# Altium PCB QNA-control-panel.PcbDoc
Units mil, origin at the board's own origin, x right, y up, seen from the top; angles counter-clockwise.
Board outline 12000 x 3500 mil, 2 copper layers (Top Layer, Bottom Layer); 43 components, 30 nets, 123 pads, 3 vias.
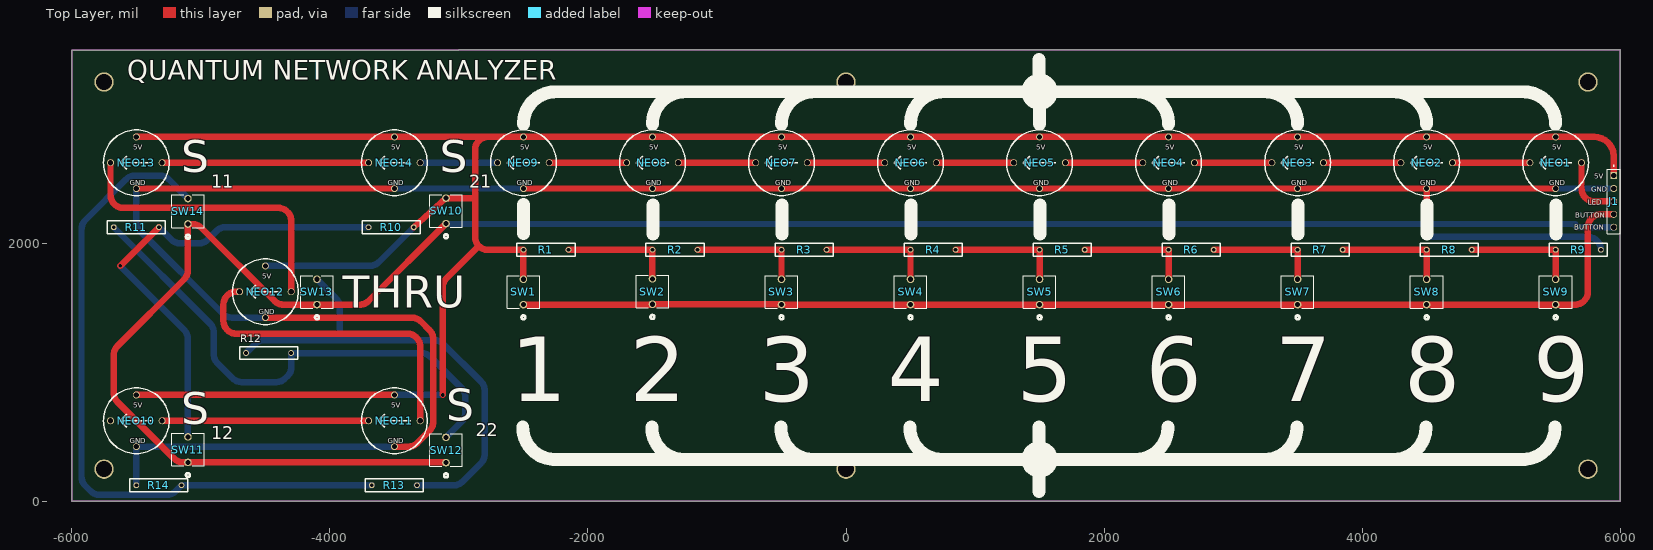
[diagram p0: Top Layer view]
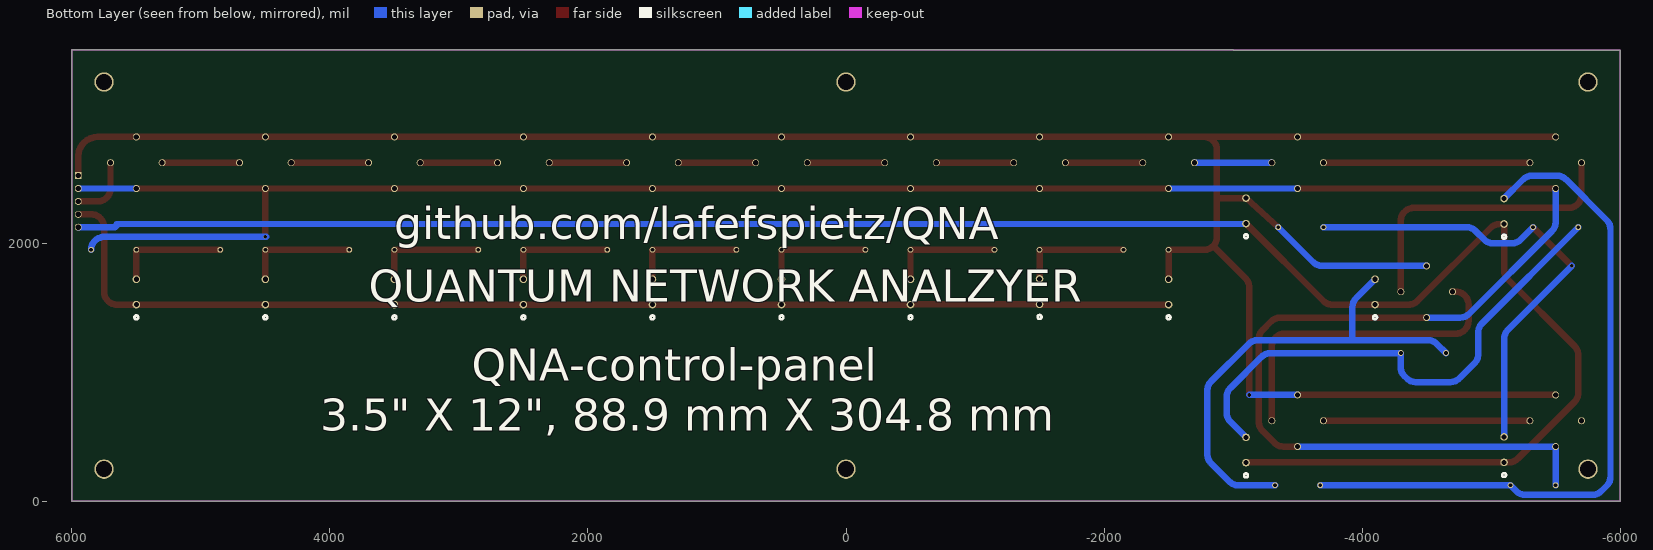
[diagram p1: Bottom Layer view, seen from below]
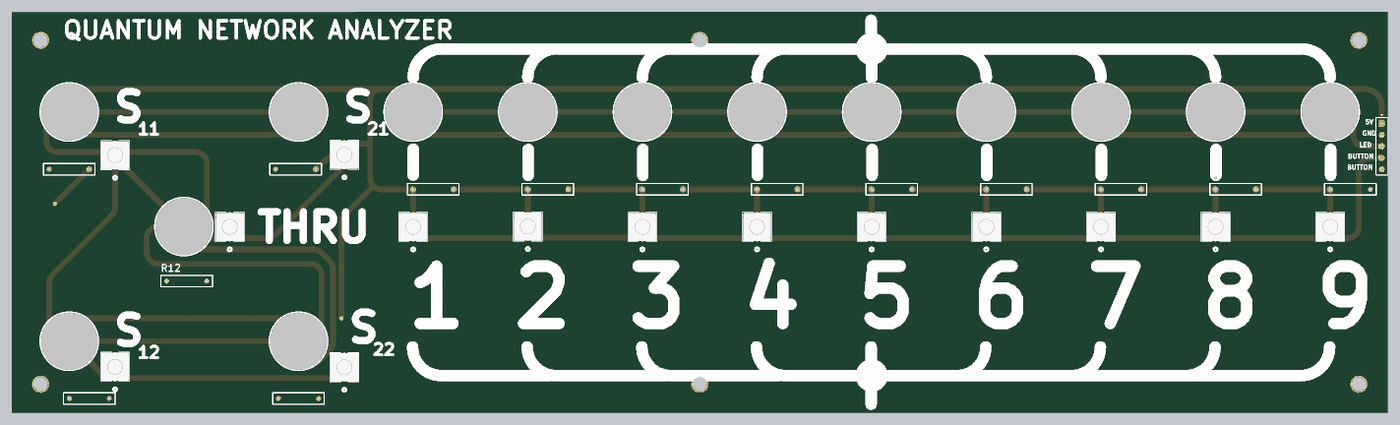
[diagram p2: 3D render of the assembled board from above, using the file's embedded part models]

## Layer stack, top to bottom
Top Solder: solder mask 0.4, Solder Resist, Dk 3.5
Top Layer: signal copper 1.4
Dielectric 1: dielectric 12.6, FR-4, Dk 4.8
Bottom Layer: signal copper 1.4
Bottom Solder: solder mask 0.4, Solder Resist, Dk 3.5

## Board outline
-6000,0 -6000,3495 -3000,3495 -3000,3500 6000,3500 6000,0

## Design rules (kind name [scope] priority, off if disabled: settings)
Clearance [All] p1: gap=10 ignorepadtopadclearanceinfootprint=FALSE except(0: Arc-Hole Track-Hole SMDPad-Hole THPad-Hole Via-Hole Fill-Hole Poly-Hole Region-Hole Text-Hole)
PolygonConnect [All] p1: connectstyle=Relief reliefconductorwidth=10 reliefentries=4 polygonreliefangle="90 Angle" airgapwidth=10
RoutingVias [All] p1: holewidth=28 width=50 viastyle="Through Hole" minholewidth=28 minwidth=50 maxholewidth=28 maxwidth=50
SolderMaskExpansion [All] p1: expansion=4 istentingtop=FALSE
Width [All] p1: maxlimit=150 minlimit=10 preferedwidth=50 toplayer_maxwidth=100 minimp=50.000000 maximp=50.000000 favimp=50.000000
30 further rules are at their usual default settings.

## Components (designator, comment, footprint, x,y, rotation, side; value= is the part's Value field where it differs from the comment)
J1 "TSW-105-07-G-S" SAMTEC_TSW-105-07-G-S 5950,2325 r270 top
NEO1 "adafruit-1559-neopixel-flora" adafruit-1559-neopixel-flora 5500,2625 r0 top
NEO2 "adafruit-1559-neopixel-flora" adafruit-1559-neopixel-flora 4500,2625 r0 top
NEO3 "adafruit-1559-neopixel-flora" adafruit-1559-neopixel-flora 3500,2625 r0 top
NEO4 "adafruit-1559-neopixel-flora" adafruit-1559-neopixel-flora 2500,2625 r0 top
NEO5 "adafruit-1559-neopixel-flora" adafruit-1559-neopixel-flora 1500,2625 r0 top
NEO6 "adafruit-1559-neopixel-flora" adafruit-1559-neopixel-flora 500,2625 r0 top
NEO7 "adafruit-1559-neopixel-flora" adafruit-1559-neopixel-flora -500,2625 r0 top
NEO8 "adafruit-1559-neopixel-flora" adafruit-1559-neopixel-flora -1500,2625 r0 top
NEO9 "adafruit-1559-neopixel-flora" adafruit-1559-neopixel-flora -2500,2625 r0 top
NEO10 "adafruit-1559-neopixel-flora" adafruit-1559-neopixel-flora -5500,625 r0 top
NEO11 "adafruit-1559-neopixel-flora" adafruit-1559-neopixel-flora -3500,625 r0 top
NEO12 "adafruit-1559-neopixel-flora" adafruit-1559-neopixel-flora -4500,1625 r0 top
NEO13 "adafruit-1559-neopixel-flora" adafruit-1559-neopixel-flora -5500,2625 r0 top
NEO14 "adafruit-1559-neopixel-flora" adafruit-1559-neopixel-flora -3500,2625 r0 top
R1 "Resistor" "thruhole resistor" -2325,1950 r180 top
R2 "Resistor" "thruhole resistor" -1325,1950 r180 top
R3 "Resistor" "thruhole resistor" -325,1950 r180 top
R4 "Resistor" "thruhole resistor" 675,1950 r180 top
R5 "Resistor" "thruhole resistor" 1675,1950 r180 top
R6 "Resistor" "thruhole resistor" 2675,1950 r180 top
R7 "Resistor" "thruhole resistor" 3675,1950 r180 top
R8 "Resistor" "thruhole resistor" 4675,1950 r180 top
R9 "Resistor" "thruhole resistor" 5675,1950 r180 top
R10 "Resistor" "thruhole resistor" -3525,2125 r0 top
R11 "Resistor" "thruhole resistor" -5500,2125 r0 top
R12 "Resistor" "thruhole resistor" -4475,1150 r0 top
R13 "Resistor" "thruhole resistor" -3500,125 r0 top
R14 "Resistor" "thruhole resistor" -5325,125 r0 top
SW1 "TL59AF100Q" SW_TL59AF100Q_EWI -2500,1525 r90 top
SW2 "TL59AF100Q" SW_TL59AF100Q_EWI -1500,1528.15 r90 top
SW3 "TL59AF100Q" SW_TL59AF100Q_EWI -500,1525 r90 top
SW4 "TL59AF100Q" SW_TL59AF100Q_EWI 500,1525 r90 top
SW5 "TL59AF100Q" SW_TL59AF100Q_EWI 1500,1525 r90 top
SW6 "TL59AF100Q" SW_TL59AF100Q_EWI 2500,1525 r90 top
SW7 "TL59AF100Q" SW_TL59AF100Q_EWI 3500,1525 r90 top
SW8 "TL59AF100Q" SW_TL59AF100Q_EWI 4500,1525 r90 top
SW9 "TL59AF100Q" SW_TL59AF100Q_EWI 5500,1525 r90 top
SW10 "TL59AF100Q" SW_TL59AF100Q_EWI -3100,2153.15 r90 top
SW11 "TL59AF100Q" SW_TL59AF100Q_EWI -5100,303.15 r90 top
SW12 "TL59AF100Q" SW_TL59AF100Q_EWI -3100,300 r90 top
SW13 "TL59AF100Q" SW_TL59AF100Q_EWI -4100,1525 r90 top
SW14 "TL59AF100Q" SW_TL59AF100Q_EWI -5100,2150 r90 top

## Footprints (in the part's own frame and the unit in brackets; to place one, negate y for a bottom-side part, rotate by r counter-clockwise, add the part's x,y. Pads: shape width x height; smd on the part's side, far side on the other; paste and mask are expansions set on the pad)
adafruit-1559-neopixel-flora [mm]
  round 1.37 hole 1.02: 5V(0,5.08) GND(0,-5.08) IN(5.08,0) OUT(-5.08,0)
  silkscreen extent -6.48,-6.48 6.48,6.48, body extent -6.35,-6.35 6.35,6.35, height 2.4
SAMTEC_TSW-105-07-G-S [mm]
  rect 1.37x1.37 hole 1.02: 01(-5.08,0)
  round 1.37 hole 1.02: 02(-2.54,0) 03(0,0) 04(2.54,0) 05(5.08,0)
  silkscreen extent -7.1,-1.27 6.35,1.27, body extent -6.48,-1.27 6.35,1.27, height 1.44
SW_TL59AF100Q_EWI [mil]
  round 59 / inner round 60 / far side round 59 hole 39 paste-99999 mask+0: 1(0,0) 2(196.85,0)
  silkscreen extent -114,-127 225,127, body extent -24,-122 220,122, height 202
"thruhole resistor" [mil] "thruhole resistor"
  round 45 hole 30: 1(-175,0) 2(175,0)
  silkscreen extent -225,-50 225,50

## Part data
J1: Package=None, Availability=Unavailable, MF="Samtec Inc.", MP=TSW-105-07-G-S, Price=None
SW1 SW2 SW3 SW4 SW5 SW6 SW7 SW8 SW9 SW10 SW11 SW12 SW13 SW14: "No Description Available", Mfr_Name=E-Switch, Copyright="Copyright (C) 2024 Ultra Librarian. All rights reserved.", Manufacturer_Part_Number=TL59AF100Q, RefDes=RefDes, Type=DEV

## Free pads (board coordinates)
  round 150 hole 123 unplated: 8(-5750,250) 8(-5750,3250) 8(0,250) 8(0,3250) 8(5750,250) 8(5750,3250)

## Via types
v1: diameter 28, hole 28, Top Layer to Bottom Layer, 3 vias

## Nets (pads, with @x,y where several pads share a name; then routed paths per layer and width w, separated by ;. In a path a pad name is that pad's centre, name@x,y a point inside that pad or via, vN(x,y) a via of type N, cw(c..) or ccw(c..) an arc to the next point about the centre after c; other vN are vias at no path point)
GND: J1.02 NEO1.GND NEO2.GND NEO3.GND NEO4.GND NEO5.GND NEO6.GND NEO7.GND NEO8.GND NEO9.GND NEO10.GND NEO11.GND NEO12.GND NEO13.GND NEO14.GND R9.1 R14.1 | length 19540.5
  Top Layer w50: NEO13.GND NEO14.GND ; NEO12.GND -3366.42,1425 cw(c-3366.42,1325) -3295.71,1395.71 -3229.29,1329.29 cw(c-3300,1258.58) -3200,1258.58 -3200,616.42 cw(c-3300,616.42) -3229.29,545.71 -3320.71,454.29 cw(c-3391.42,525) -3391.42,425 NEO11.GND ; NEO9.GND NEO8.GND NEO7.GND NEO6.GND NEO5.GND NEO4.GND NEO3.GND NEO2.GND ; v1(4500,2050) NEO2.GND ; NEO1.GND NEO2.GND
  Bottom Layer w50: R14.1 NEO10.GND NEO11.GND ; NEO13.GND -5500,2166.42 ccw(c-5400,2166.42) -5470.71,2095.71 -4829.29,1454.29 ccw(c-4758.58,1525) -4758.58,1425 NEO12.GND ; NEO14.GND NEO9.GND ; v1@4494.69,2050 v1(4500,2050) 5750,2050 cw(c5750,1950) R9.1 ; NEO1.GND J1.02
NetJ1_01: J1.01 NEO1.5V NEO2.5V NEO3.5V NEO4.5V NEO5.5V NEO6.5V NEO7.5V NEO8.5V NEO9.5V NEO10.5V NEO11.5V NEO12.5V NEO13.5V NEO14.5V R1.2 R10.2 SW1.2 SW10.2 | length 18649.2
  Top Layer w50: NEO10.5V NEO11.5V ; NEO13.5V NEO14.5V -2775,2825 ; R10.2 SW10.2 -2875,2350 ; v1(-3125,825) -3125,1658.58 cw(c-3025,1658.58) -3095.71,1729.29 -2845.71,1979.29 ; SW1.2 R1.2 -2775,1950 cw(c-2775,2050) -2845.71,1979.29 ; J1.01 5950,2673.48 ccw(c5798.48,2673.48) 5798.48,2825 NEO1.5V NEO2.5V NEO3.5V NEO4.5V NEO5.5V NEO6.5V NEO7.5V NEO8.5V NEO9.5V -2775,2825 ; -2875,2350 -2875,2725 cw(c-2775,2725) -2775,2825 ; -2875,2350 -2875,2050 ccw(c-2775,2050) -2845.71,1979.29
  Bottom Layer w50: NEO12.5V -3691.42,1825 ccw(c-3691.42,1925) -3620.71,1854.29 R10.2 ; NEO11.5V v1(-3125,825)
NetJ1_03: J1.03 NEO1.IN | length 507.1
  Top Layer w50: NEO1.IN 5700,2425 ccw(c5800,2425) 5800,2325 J1.03
NetJ1_04: J1.04 SW1.1 SW2.1 SW3.1 SW4.1 SW5.1 SW6.1 SW7.1 SW8.1 SW9.1 | length 9065.8
  Top Layer w50: SW1.1 -1507.6,1525 ccw(c-1507.6,1535.75) SW2.1 -507.6,1528.15 cw(c-507.6,1517.4) SW3.1 SW4.1 SW5.1 SW6.1 SW7.1 SW8.1 SW9.1 5650,1525 ccw(c5650,1625) 5750,1625 5750,2125 cw(c5850,2125) 5850,2225 J1.04
NetJ1_05: J1.05 SW10.1 SW11.1 SW12.1 SW13.1 SW14.1 | length 15923.9
  Top Layer w50: SW12.1 ccw(c-3107.6,292.4) -3107.6,303.15 SW11.1 -5136.73,303.15 cw(c-5136.73,403.15) -5207.44,332.44 -5645.71,770.71 cw(c-5575,841.42) -5675,841.42 -5675,1133.58 cw(c-5575,1133.58) -5645.71,1204.29 -5129.29,1720.71 ccw(c-5200,1791.42) -5100,1791.42 SW14.1 -5066.42,2150 cw(c-5066.42,2050) -4995.71,2120.71 -4429.29,1554.29 ccw(c-4358.58,1625) -4358.58,1525 SW13.1 -3769.57,1525 ccw(c-3769.57,1625) -3698.86,1554.29 SW10.1
  Bottom Layer w50: SW10.1 ccw(c-3092.4,2160.75) -3092.4,2150 5650,2150 ccw(c5675,2150) 5675,2125 J1.05
NetNEO1_OUT: NEO1.OUT NEO2.IN | length 600
  Top Layer w50: NEO2.IN NEO1.OUT
NetNEO2_OUT: NEO2.OUT NEO3.IN | length 600
  Top Layer w50: NEO3.IN NEO2.OUT
NetNEO3_OUT: NEO3.OUT NEO4.IN | length 600
  Top Layer w50: NEO4.IN NEO3.OUT
NetNEO4_OUT: NEO4.OUT NEO5.IN | length 600
  Top Layer w50: NEO5.IN NEO4.OUT
NetNEO5_OUT: NEO5.OUT NEO6.IN | length 600
  Top Layer w50: NEO6.IN NEO5.OUT
NetNEO6_OUT: NEO6.OUT NEO7.IN | length 600
  Top Layer w50: NEO7.IN NEO6.OUT
NetNEO7_OUT: NEO7.OUT NEO8.IN | length 600
  Top Layer w50: NEO8.IN NEO7.OUT
NetNEO8_OUT: NEO8.OUT NEO9.IN | length 600
  Top Layer w50: NEO9.IN NEO8.OUT
NetNEO9_OUT: NEO9.OUT NEO14.IN | length 600
  Bottom Layer w50: NEO14.IN NEO9.OUT
NetNEO10_IN: NEO10.IN NEO11.OUT | length 1600
  Top Layer w50: NEO10.IN NEO11.OUT
NetNEO11_IN: NEO11.IN NEO12.OUT | length 2521.2
  Top Layer w50: NEO12.OUT -4725,1625 ccw(c-4725,1525) -4825,1525 -4825,1400 ccw(c-4725,1400) -4725,1300 -3400,1300 cw(c-3400,1200) -3300,1200 NEO11.IN
NetNEO12_IN: NEO12.IN NEO13.OUT | length 2314.2
  Top Layer w50: NEO13.OUT -5700,2375 ccw(c-5600,2375) -5600,2275 -4400,2275 cw(c-4400,2175) -4300,2175 NEO12.IN
NetNEO13_IN: NEO13.IN NEO14.OUT | length 1600
  Top Layer w50: NEO13.IN NEO14.OUT
NetR1_1: R1.1 R2.2 SW2.2 | length 875
  Top Layer w50: R1.1 R2.2 SW2.2
NetR2_1: R2.1 R3.2 SW3.2 | length 878.1
  Top Layer w50: R2.1 R3.2 SW3.2
NetR3_1: R3.1 R4.2 SW4.2 | length 878.1
  Top Layer w50: R3.1 R4.2 SW4.2
NetR4_1: R4.1 R5.2 SW5.2 | length 878.1
  Top Layer w50: R4.1 R5.2 SW5.2
NetR5_1: R5.1 R6.2 SW6.2 | length 878.1
  Top Layer w50: R5.1 R6.2 SW6.2
NetR6_1: R6.1 R7.2 SW7.2 | length 878.1
  Top Layer w50: R6.1 R7.2 SW7.2
NetR7_1: R7.1 R8.2 SW8.2 | length 878.1
  Top Layer w50: R7.1 R8.2 SW8.2
NetR8_1: R8.1 R9.2 SW9.2 | length 878.1
  Top Layer w50: R8.1 R9.2 SW9.2
NetR10_1: R10.1 R11.2 SW11.2 | length 3678.1
  Top Layer w50: v1(-5625,1825) R11.2
  Bottom Layer w50: v1(-5625,1825) -5129.29,1329.29 cw(c-5200,1258.58) -5100,1258.58 SW11.2 ; R11.2 -5229.29,2029.29 ccw(c-5158.58,2100) -5158.58,2000 -5016.42,2000 ccw(c-5016.42,2100) -4945.71,2029.29 -4879.29,2095.71 cw(c-4808.58,2025) -4808.58,2125 R10.1
NetR11_1: R11.1 R12.2 SW12.2 | length 4055.3
  Bottom Layer w50: R11.1 -4929.29,1379.29 cw(c-5000,1308.58) -4900,1308.58 -4900,1141.42 ccw(c-4800,1141.42) -4870.71,1070.71 -4754.29,954.29 ccw(c-4683.58,1025) -4683.58,925 -4416.42,925 ccw(c-4416.42,1025) -4345.71,954.29 -4325,975 ccw(c-4385.36,1035.36) -4300,1035.36 R12.2 -3291.42,1150 cw(c-3291.42,1050) -3220.71,1120.71 -2979.29,879.29 cw(c-3050,808.58) -2950,808.58 -2950,688.27 cw(c-3050,688.27) -2979.29,617.56 SW12.2
NetR12_1: R12.1 R13.2 SW13.2 | length 3737.8
  Bottom Layer w50: R12.1 -4579.29,1220.71 cw(c-4508.58,1150) -4508.58,1250 -3925,1250 ; SW13.2 -3954.29,1576.14 cw(c-4025,1505.43) -3925,1505.43 -3925,1250 ; R13.2 -3041.42,125 ccw(c-3041.42,225) -2970.71,154.29 -2829.29,295.71 ccw(c-2900,366.42) -2800,366.42 -2800,858.58 ccw(c-2900,858.58) -2829.29,929.29 -3120.71,1220.71 ccw(c-3191.42,1150) -3191.42,1250 -3925,1250
NetR13_1: R13.1 R14.2 SW14.2 | length 5350.8
  Bottom Layer w50: SW14.2 -5248.86,2495.71 ccw(c-5319.57,2425) -5319.57,2525 -5508.58,2525 ccw(c-5508.58,2425) -5579.29,2495.71 -5895.71,2179.29 ccw(c-5825,2108.58) -5925,2108.58 -5925,191.42 ccw(c-5825,191.42) -5895.71,120.71 -5854.29,79.29 ccw(c-5783.58,150) -5783.58,50 -5266.42,50 ccw(c-5266.42,150) -5195.71,79.29 R14.2 R13.1
pads on no net: NEO10.OUT

## Keep-outs
Keep-Out Layer:
  lines w10: -3000,3495 -6000,3495 -6000,0 -3000,0 6000,0 ; -3000,3500 6000,3500 6000,2580 6000,930 6000,5

## Silkscreen, mask and mechanical layers (free items; w line width, h text height)
Top Overlay:
  circle w100: c1500,325 r90.14
  circle w100: c1500,3175 r90.14
  lines w10: -5575,575 -5625,625 ; -5575,675 -5625,625 ; -5575,2575 -5625,2625 ; -5575,2675 -5625,2625 ; -5375,625 -5625,625 ; -5375,2625 -5625,2625 ; -4575,1575 -4625,1625 ; -4575,1675 -4625,1625 ; -4375,1625 -4625,1625 ; -3575,575 -3625,625 ; -3575,675 -3625,625 ; -3575,2575 -3625,2625 ; -3575,2675 -3625,2625 ; -3375,625 -3625,625 ; -3375,2625 -3625,2625 ; -2575,2575 -2625,2625 ; -2575,2675 -2625,2625 ; -2375,2625 -2625,2625 ; -1575,2575 -1625,2625 ; -1575,2675 -1625,2625 ; -1375,2625 -1625,2625 ; -575,2575 -625,2625 ; -575,2675 -625,2625 ; -375,2625 -625,2625 ; 425,2575 375,2625 ; 425,2675 375,2625 ; 625,2625 375,2625 ; 1425,2575 1375,2625 ; 1425,2675 1375,2625 ; 1625,2625 1375,2625 ; 2425,2575 2375,2625 ; 2425,2675 2375,2625 ; 2625,2625 2375,2625 ; 3425,2575 3375,2625 ; 3425,2675 3375,2625 ; 3625,2625 3375,2625 ; 4425,2575 4375,2625 ; 4425,2675 4375,2625 ; 4625,2625 4375,2625 ; 5425,2575 5375,2625 ; 5425,2675 5375,2625 ; 5625,2625 5375,2625
  lines w100: -2505.06,575.35 ccw(c-2255.06,575.35) -2255.06,325.35 5244.94,325.35 ccw(c5244.94,575.35) 5494.94,575.35 ; -2500,2075 -2500,2300 ; -2500,2925 cw(c-2250,2925) -2250,3175 5250,3175 cw(c5250,2925) 5500,2925 ; -1505.06,575.35 ccw(c-1255.06,575.35) -1255.06,325.35 ; -1500,2925 cw(c-1250,2925) -1250,3175 ; -1496.47,2072.4 -1496.47,2297.4 ; -505.06,575.35 ccw(c-255.06,575.35) -255.06,325.35 ; -500,2925 cw(c-250,2925) -250,3175 ; -496.47,2072.4 -496.47,2297.4 ; 494.94,575.35 ccw(c744.94,575.35) 744.94,325.35 ; 500,2925 cw(c750,2925) 750,3175 1500,3175 1500,2925 ; 503.53,2072.4 503.53,2297.4 ; 1494.94,75.35 1494.94,325.35 ; 1494.94,575.35 1494.94,325.35 ; 1494.94,3175.35 1494.94,3425.35 ; 1503.53,2072.4 1503.53,2297.4 ; 2250,3175 cw(c2250,2925) 2500,2925 ; 2494.94,575.35 cw(c2244.94,575.35) 2244.94,325.35 1494.94,325.35 ; 2503.53,2072.4 2503.53,2297.4 ; 3244.94,325.35 ccw(c3244.94,575.35) 3494.94,575.35 ; 3250,3175 cw(c3250,2925) 3500,2925 ; 3503.53,2072.4 3503.53,2297.4 ; 4244.94,325.35 ccw(c4244.94,575.35) 4494.94,575.35 ; 4250,3175 cw(c4250,2925) 4500,2925 ; 4503.53,2072.4 4503.53,2297.4 ; 5503.53,2072.4 5503.53,2297.4
  text "QUANTUM NETWORK ANALYZER" at -5570,3269.28 h150
  text "5V" at -5525,2725 h39.37
  text "5V" at -3525,2725 h39.37
  text "5V" at -2525,2725 h39.37
  text "5V" at -1525,2725 h39.37
  text "5V" at -525,2725 h39.37
  text "5V" at 475,2725 h39.37
  text "5V" at 1475,2725 h39.37
  text "5V" at 2475,2725 h39.37
  text "5V" at 3475,2725 h39.37
  text "5V" at 4475,2725 h39.37
  text "5V" at 5475,2725 h39.37
  text "S" at -5150,2550 h250
  text "S" at -3150,2550 h250
  text "5V" at 5800,2500 h39.37
  text "GND" at -5550,2450 h39.37
  text "GND" at -3550,2450 h39.37
  text "GND" at -2550,2450 h39.37
  text "GND" at -1550,2450 h39.37
  text "GND" at -550,2450 h39.37
  text "GND" at 450,2450 h39.37
  text "GND" at 1450,2450 h39.37
  text "GND" at 2450,2450 h39.37
  text "GND" at 3450,2450 h39.37
  text "GND" at 4450,2450 h39.37
  text "GND" at 5450,2450 h39.37
  text "11" at -4920,2430 h100
  text "21" at -2920,2430 h100
  text "GND" at 5775,2400 h39.37
  text "LED" at 5750,2300 h39.37
  text "BUTTON" at 5650,2200 h39.37
  text "BUTTON" at 5642.93,2103.59 h39.37
  text "5V" at -4525,1725 h39.37
  text "THRU" at -3900,1500 h250
  text "GND" at -4550,1450 h39.37
  text "1" at -2600,775 h500
  text "2" at -1675,775 h500
  text "3" at -675,775 h500
  text "4" at 325,775 h500
  text "5" at 1325,775 h500
  text "6" at 2325,775 h500
  text "7" at 3325,775 h500
  text "8" at 4325,775 h500
  text "9" at 5325,775 h500
  text "5V" at -5525,725 h39.37
  text "5V" at -3525,725 h39.37
  text "S" at -3100,625 h250
  text "S" at -5150,600 h250
  text "22" at -2870,505 h100
  text "12" at -4920,480 h100
  text "GND" at -5550,450 h39.37
  text "GND" at -3550,450 h39.37
Bottom Overlay:
  text "github.com/lafefspietz/QNA" at 3500,2033.32 h250
  text "QUANTUM NETWORK ANALZYER" at 3700,1548.8 h250
  text "QNA-control-panel" at 2900,933.32 h250
  text "3.5\" X 12\", 88.9 mm X 304.8 mm" at 4075,547.61 h250